# Altium PCB ALTAIR_PD_Squad_V26.5a_cut.PcbDoc (part 2 of 4)
Units mm, origin at the board's own origin, x right, y up, seen from the top; angles counter-clockwise.
Board outline 74 x 56 mm, 4 copper layers (Top Layer, Layer 2, Layer 3, Bottom Layer), stack 1.818 mm thick; 213 components, 155 nets, 610 pads, 404 vias.
Unrouted connection lines stored in the file: 6.
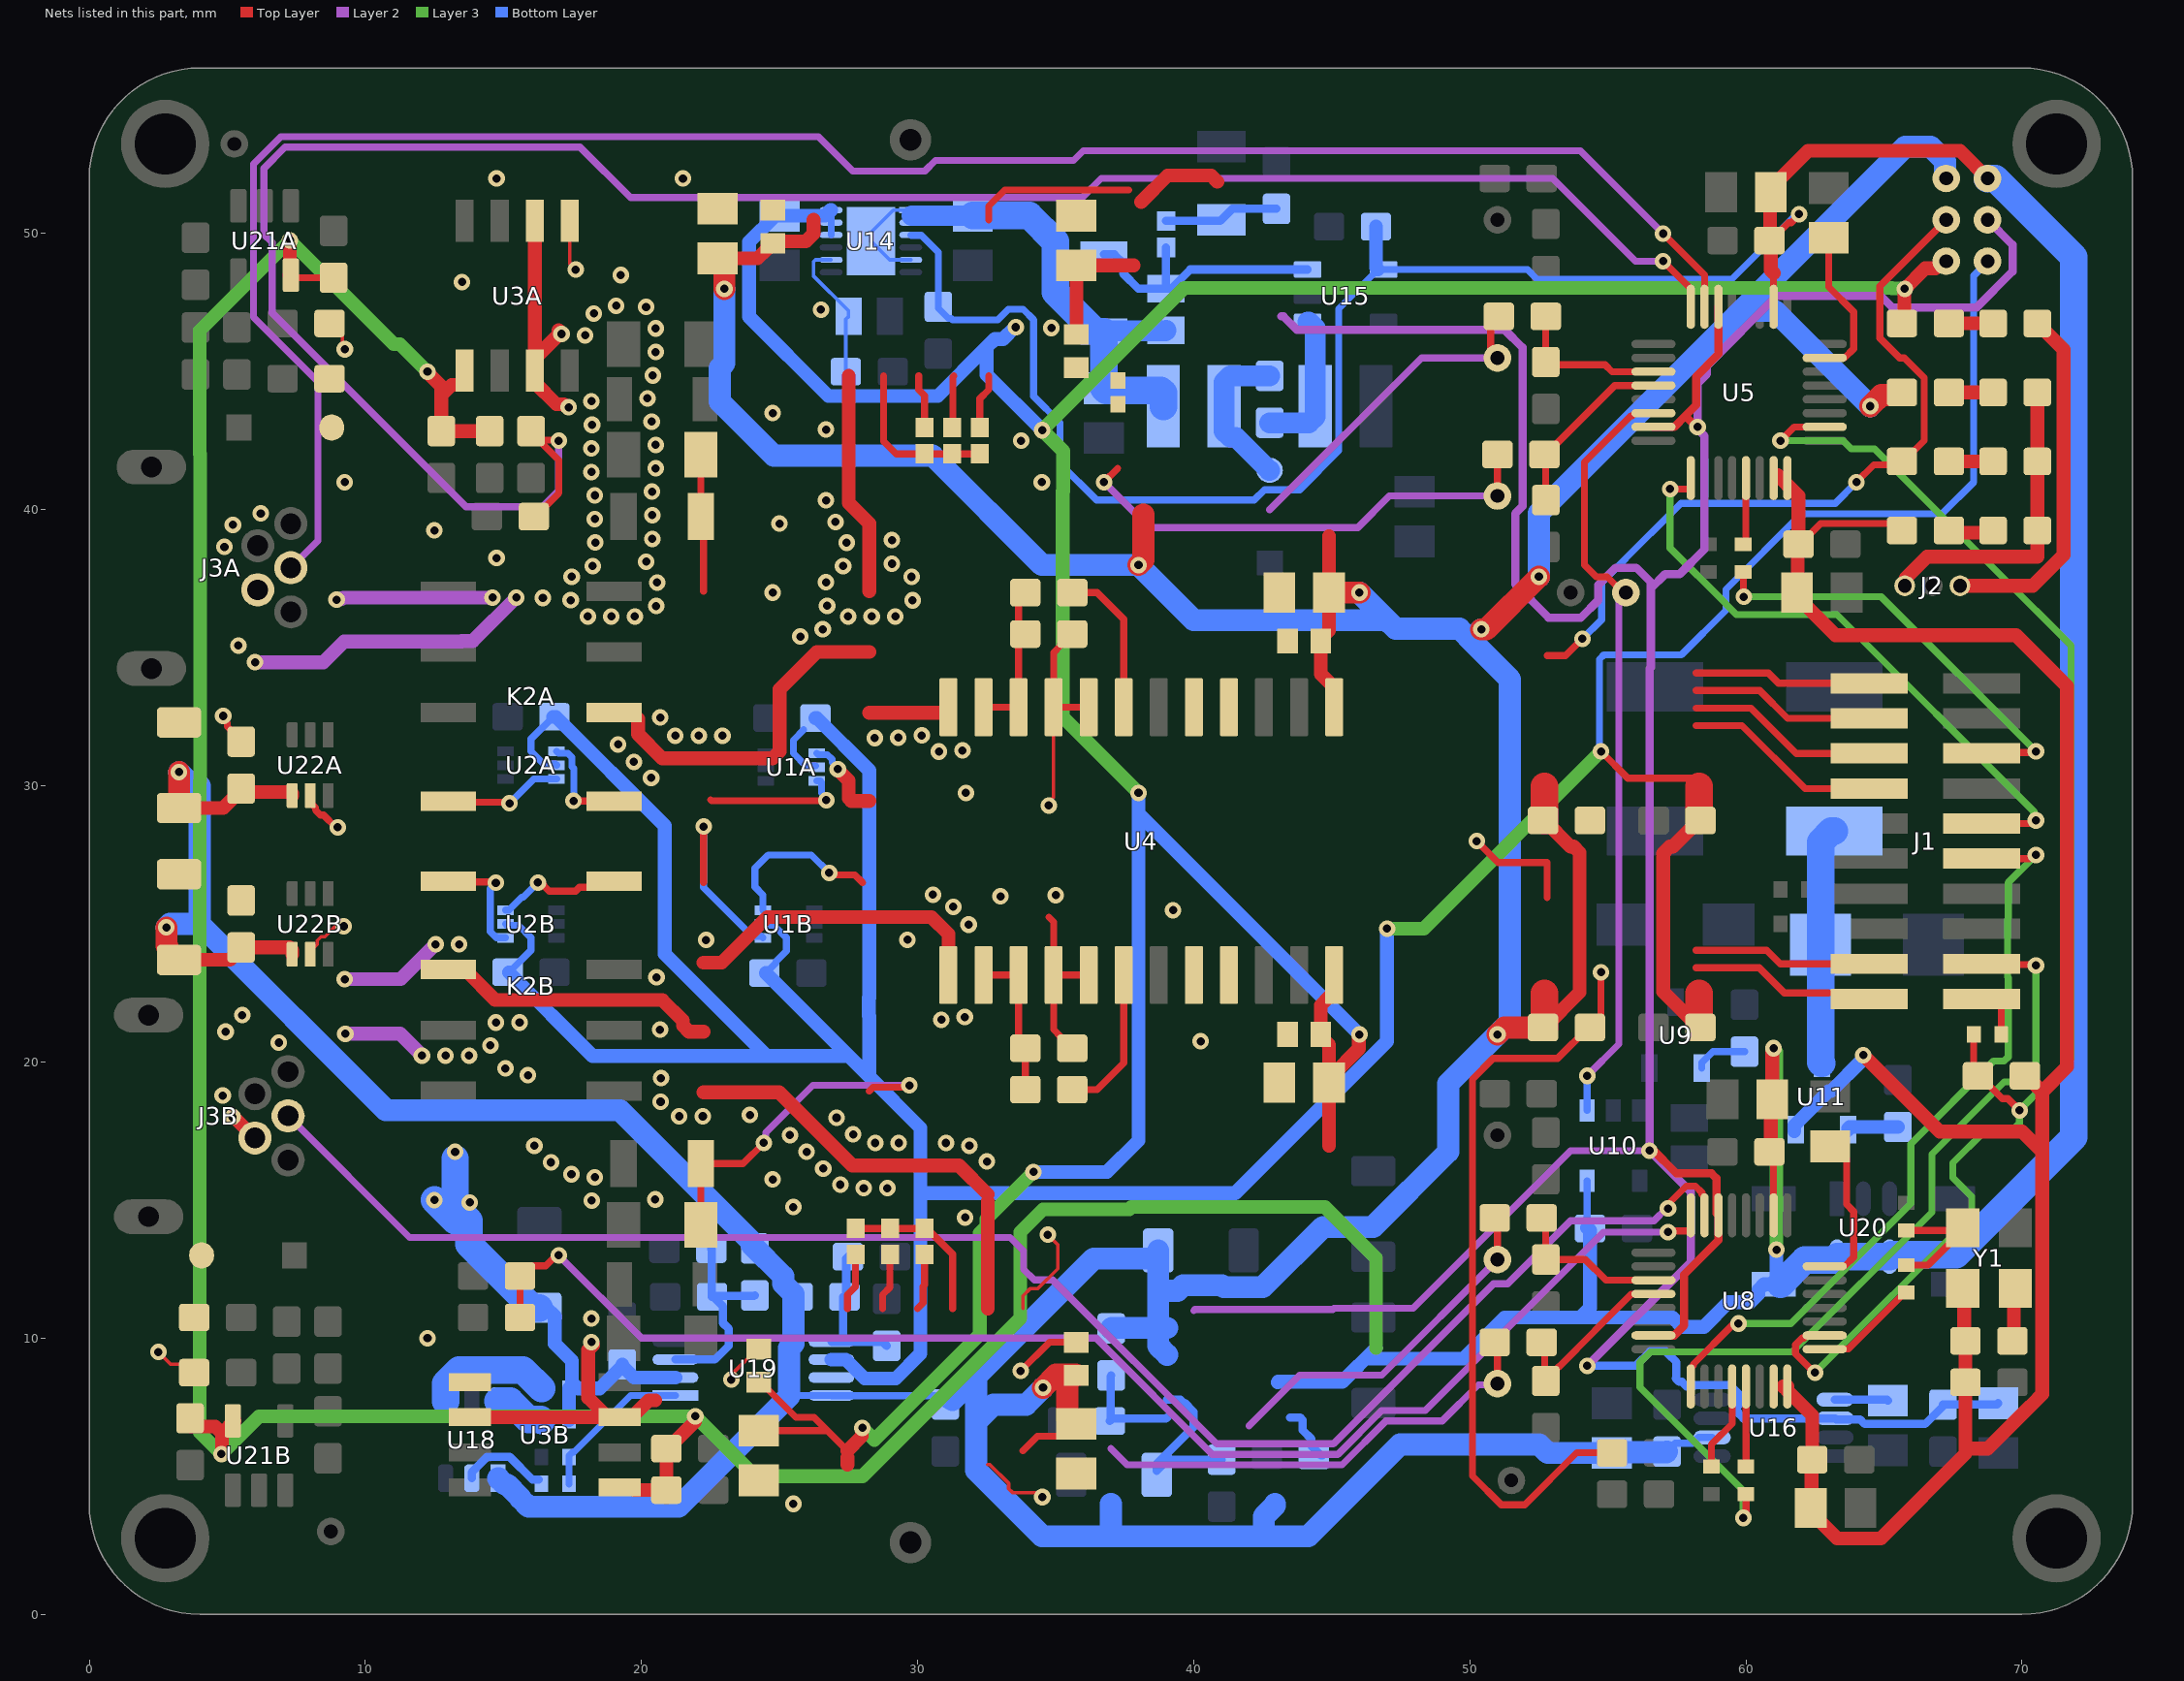
[diagram p4: the nets of this part, all layers, seen from the top]

## Part data
C00A C0A C00B C0B: library part CAP, "Murata GRT188R61H105KE13D - Cap Ceramic 1uF 10% 50V X5R 0603 (Placeholder)", MF=Murata, MP=GRT188R61H105KE13D
C1A C1B C2A C2B C6A C6B C7 C9 C11 C13 C19A C19B C21A C21B C27 C29 C36 C37 C38 C39 C40 C41 C50 C54 C59 C64 C65 C67A C67B C71A C71B: library part CAP, "Kemet C0603C104K5RACAUTO - Cap Ceramic 0.1uF 50V X7R 10% 0603 125C Paper T/R", MF=Kemet, MP=C0603C104K5RACAUTO
C3A C3B: library part CAP, "Kemet C1206C301K5GACTU - Cap Ceramic 300pF 10% 50V NP0 1206", MF=Kemet, MP=C1206C301K5GACTU
C4A C4B: library part CAP, "Wurth Elektronik 885012008037 - Cap Ceramic 10pF 5% 50V NP0 1206", MF="Wurth Elektronik", MP=885012008037
C5A C5B C42 C49 C61 C66A C66B: library part CAP, "Murata GRT188R61H105KE13D - Cap MLCC AEC-Q200 X5R 1uF 50V 0603", MF=Murata, MP=GRT188R61H105KE13D
C8 C10 C12 C14 C17 C20A C20B C22A C22B C28 C30 C33 C43 C44 C46 C48 C51 C52 C53: library part CAP, "Murata GRM21BR61E106KA73L - Cap Ceramic 10uF 10% 25V X5R 0805", MF=Murata, MP=GRM21BR61E106KA73L
C15 C16 C18 C31 C32 C34 C35: library part CAP, "Murata GCM1885C1H202FA16J 50V 2nF C0G ±1% 0603", MF=Murata, MP=GCM1885C1H202FA16J
C45: library part CAP, "Kemet C1206C331J5GACTU - Cap Ceramic 330pF 50V 5% NP0 1206", MF=Kemet, MP=C1206C331J5GACTU
C47: library part CAP, "Kemet C0805C475K8PACTU - Cap Ceramic 4.7uF 10V X5R 0805", MF=Kemet, MP=C0805C475K8PACTU
C55 C56 C57 C58 C60 C68A C68B: library part CAP, "Murata GRT319R6YA106KE01D - Cap Ceramic 10uF 35V X5R 10% Pad SMD 1206 85C Automotive T/R", MF=Murata, MP=GRT319R6YA106KE01D
C62 C63: library part CAP, "CL31B225KBHNNNE CAP CER 2.2UF 50V X7R 1206", MF="Samsung Electro-Mechanics", MP=CL31B225KBHNNNE
D1: library part Zener, "Vishay SMAJ12A-M3/61 - TVS Diode 12V Standoff 13.3V Breakdown DO-214AC", MF="Vishay General Semiconductor", MP=SMAJ12A-M3/61
D2: "600 W, 3.3 V TVS in SMB", Manufacturer_Name=STMicroelectronics, Copyright="Copyright (C) 2025 Ultra Librarian. All rights reserved.", Manufacturer_Part_Number=SMLVT3V3, RefDes=Refdes
D3 D5 D6 D7: library part LED-blue, "LED RED CLEAR 0603 SMD", Case Code (Imperial)=0603, Case Code (Metric)=1608, Color=Blue, Forward Current=30mA, Forward Voltage=3.2V, Max Operating Temperature=85°C, Min Operating Temperature=-40°C, Package Quantity=4000, Supplier Part Number 1=732-4966-1-ND, Test Current=20mA, Case/Package=0603, Category=LEDs, ComponentLink1Description=https://datasheet.ciiva.com/29563/150060bs75000-29563034.pdf?src-supplier=Digi-Key, ComponentLink1URL=https://datasheet.ciiva.com/29563/150060bs75000-29563034.pdf?src-supplier=Digi-Key, ComponentLink2Description=https://datasheet.ciiva.com/29279/759426-da-01-en-chipled-0603-w-kl-blau-150060bs75000-29279193.pdf?src-supplier=Conrad, ComponentLink2URL=https://datasheet.ciiva.com/29279/759426-da-01-en-chipled-0603-w-kl-blau-150060bs75000-29279193.pdf?src-supplier=Conrad, ComponentLink3Description=https://datasheet.ciiva.com/29563/150060bs75000-29563035.pdf?src-supplier=Digi-Key, ComponentLink3URL=https://datasheet.ciiva.com/29563/150060bs75000-29563035.pdf?src-supplier=Digi-Key, ComponentLink4Description=https://datasheet.ciiva.com/29563/150060bs75000-29563036.pdf?src-supplier=Digi-Key, ComponentLink4URL=https://datasheet.ciiva.com/29563/150060bs75000-29563036.pdf?src-supplier=Digi-Key, ComponentLink5Description=https://datasheet.ciiva.com/22656/1911343-22656939.pdf?src-supplier=Element14, ComponentLink5URL=https://datasheet.ciiva.com/22656/1911343-22656939.pdf?src-supplier=Element14, ComponentLink6Description=https://datasheet.ciiva.com/48430/150060bs75000-eng-tds-48430039.pdf?src-supplier=Distrelec, ComponentLink6URL=https://datasheet.ciiva.com/48430/150060bs75000-eng-tds-48430039.pdf?src-supplier=Distrelec, Dominant Wavelength=470nm, Height=0.7mm, Length=1.6mm, Lens Style=Clear,Rectangular, Luminous Intensity=145mcd, MF="Wurth Electronics", Mount="Surface Mount", MP=150060RS75000, Packaging="Cut Tape", REACH SVHC=Unknown, RoHS=Yes, Stock 1=66561, Supplier 1=Digi-Key, Viewing Angle=140°, Wavelength=470nm, Width=0.8mm
D4: library part Schottky, "DIODE SCHOTTKY 20V 500MA SOD123", Average Rectified Current=500mA, Case/Package=SOD-123-2, Forward Voltage=385mV, Max Forward Surge Current (Ifsm)=5.5A, Max Operating Temperature=125°C, Max Repetitive Reverse Voltage (Vrrm)=20V, Max Reverse Leakage Current=250uA, Min Operating Temperature=-65°C, Package Quantity=3000, Contact Plating=Tin, Current Rating=500mA, Element Configuration=Single, Forward Current=500mA, Height=1.12mm, Lead Free="Lead Free", Length=2.69mm, Max Reverse Voltage (DC)=20V, Max Surge Current=5.5A, MF=onsemi, MP=MBR0520LT1G, Number of Pins=2, Output Current=500mA, Packaging="Tape and Reel", Peak Non-Repetitive Surge Current=5.5A, Peak Reverse Current=250uA, Polarity=Standard, Radiation Hardening=No, REACH SVHC="No SVHC", Termination=SMD/SMT, Voltage Rating (DC)=20V, Width=1.6mm
D8A D8B: library part Zener, "DIODE ZENER SOD123", MF=onsemi, MP=MMSZ4679T1G
F1 F2: library part Polyfuse, "Bel Fuse 0ZCG0030FF2C - Polymeric PTC Resettable Fuse 30V 300mA hold 600mA trip SMD 1812", MF="Bel Fuse Inc.", MP=0ZCG0030FF2C
H1 H2 H3 H4 SH1: "(Plated) Mounting hole"
J1: Package=None, Availability=Unavailable, MF=Samtec, MP=FTSH-110-01-X-DV-K-TR, Price=None
J2: "3x1 Header SMD", Manufacturer_Name="GCT (GLOBAL CONNECTOR TECHNOLOGY)", Datasheet Link=https://www.mouser.com/datasheet/2/837/BC020-1948594.pdf, Height=3.2mm, Manufacturer_Part_Number=BC020-03-A-0200-0300-L-G
J3A J3B: "Conn Mini-USB RCP 5 POS Solder ST Thru-Hole 5 Terminal 1 Port", Color=Black, Flammability Rating="UL94 V-0", Supplier Part Number 1=UE25BE5510H-ND, Category="USB Connectors", ComponentLink1Description=http://components.arrow.com/part/dataview/0323_00956300?src-supplier=Arrow+Europe, ComponentLink1URL=http://components.arrow.com/part/dataview/0323_00956300?src-supplier=Arrow+Europe, ComponentLink2Description=http://www.alliedelec.com/m/d/e7e3d7a920045eebbdef787e60d8b001.pdf?src-supplier=Allied+Electronics, ComponentLink2URL=http://www.alliedelec.com/m/d/e7e3d7a920045eebbdef787e60d8b001.pdf?src-supplier=Allied+Electronics, ComponentLink3Description=https://www.amphenolcanada.com/ProductSearch/drawings/AC/UE25BEX510X.pdf?src-supplier=Digi-Key, ComponentLink3URL=https://www.amphenolcanada.com/ProductSearch/drawings/AC/UE25BEX510X.pdf?src-supplier=Digi-Key, Contact Material="Copper Alloy", Contact Plating=Gold, Features="High Temperature", Gender=Female, Lead Free="Lead Free", MF="Amphenol Commercial", Mount="Through Hole", MP=UE25BE5510H, Number of Contacts=5, Number of Positions=5, RoHS=Yes, Stock 1=6446, Supplier 1=Digi-Key, Termination=PCB
K2A K2B: "RelÃ© RF, CC, biestable, 1 bobina, 2 conectores DPDT-CO de forma C, capacidad de contacto de 2 A, voltaje de bobina de 4,5 V CC, voltaje de contacto de 250 V CA, Axicom IM", Package=None, Check_prices=https://www.snapeda.com/parts/3-1462037-1/TE+Connectivity+Potter+%2526+Brumfield+Relays/view-part/?ref=eda, EU_RoHS_Compliance=Compliant, MF="TE Connectivity", MP=3-1462037-1, SnapEDA_Link=https://www.snapeda.com/parts/3-1462037-1/TE+Connectivity+Potter+%2526+Brumfield+Relays/view-part/?ref=snap
L1 L2: library part IND, "TDK VLS3012CX-100M-1 - Inductor 10uH 20% 1.25A 0.324Ohm NonstandardPkg", DC Resistance (DCR)=324mR, Inductance Tolerance=20%, Max DC Current=1.25A, Max Operating Temperature=105°C, Min Operating Temperature=-40°C, Resistor Type=Wirewound, Saturation Current=1A, Test Frequency=100kHz, Core Material=Ferrite, Height=1.20mm, Height - Seated (Max)=0.047inch, Inductance=10uH, Lead Free="Lead Free", Length=3.00mm, MF="TDK Corporation", Mount="Surface Mount", MP=VLS3012CX-100M-1, Number of Pins=2, Packaging="Tape and Reel", Series=VLS-CX-1, Termination=SMD/SMT, Tolerance=20%, Width=3.00mm
R0A R0B: library part RES, "Yageo RC0402JR-070RL - Res 0 Ohms 1/16W SMD 0402", MF=YAGEO, MP=RC0402JR-070RL
R1A R1B: library part RES, "Stackpole RNCF1206TKY10K0 - Res 10k 0.01% 1/4W SMD 1206", MF="Stackpole Electronics Inc.", MP=RNCF1206TKY10K0
R2A R2B: library part RES, "Vishay TNPV12061M00BYEN - Res 1MOhm 0.1% 1/4W SMD 1206", MF="Vishay Dale", MP=TNPV12061M00BYEN
R5 R6 R7 R8 R15A R15B R16A R16B R17A R17B: library part IMPEDANCE, "Yageo RC0402JR-070RL - Res 0 Ohms 1/16W SMD 0402", MF=YAGEO, MP=RC0402JR-070RL
R9 R11 R13 R19 R21 R23 R24: library part RES, "Panasonic ERJ-3EKF2001V Res Thick Film 0603 2K Ohm 1% 1/10W ±100ppm/°C", MF="Panasonic Electronic Components", MP=ERJ-3EKF2001V
R10 R12 R20 R22 R29 R30 R31 R47 R51: library part RES, "Stackpole RMCF0402JT47R0 - Res 47Ohm 5% 0.063W 0402 Thick Film AEC-Q200 compliant", MF="Stackpole Electronics Inc.", MP=RMCF0402JT47R0
R18A1: library part RES, "Panasonic ERA-2AEB5111X - Res 5.11k 0.1% 1/16W SMD 0402", MF="Panasonic Electronic Components", MP=ERA-2AEB5111X
R25 R26 R28 R35: library part RES, "Panasonic ERJ-U03F1001V - Res SMD 1 kOhm 1% 1/10W 0603", MF="Panasonic Electronic Components", MP=ERJ-U03F1001V
R27 R33 R43 R54 R55: library part RES, "Vishay CRCW060310K0FKEA SMD 0603 10k, CRCW e3 Series, 75V, thick film, 100mW", MF="Vishay Dale", MP=CRCW060310K0FKEA
R32 R34: library part RES, "Yageo RC0402FR-0733RL - Res 33Ohm 1% 1/16W 0402", MF=YAGEO, MP=RC0402FR-0733RL
R36: library part RES, "Panasonic ERA-6AEB303V - Res 30kOhm 0.1% 1/8W 0805", MF="Panasonic Electronic Components", MP=ERA-6AEB303V
R37: library part RES, "Yageo RC0402FR-071KL - Res 1kOhm 1% 1/16W 0402", MF=YAGEO, MP=RC0402FR-071KL
R38 R39: library part RES, "Panasonic ERJ-3GEYJ104V - Res 100k 5% 1/10W SMD 0603", MF="Panasonic Electronic Components", MP=ERJ-3GEYJ104V
R40: library part RES, "Panasonic ERA-3AEB114V - Res 110k 0.1% 1/10W SMD 0603", MF="Panasonic Electronic Components", MP=ERA-3AEB114V
R41: library part RES, "Vishay TNPU12061K50BZEN00 - Res 1.5kOhm 0.1% 1/4W 1206", MF="Vishay Dale", MP=TNPU12061K50BZEN00
R42 R56A R56B R57A R57B: library part RES, "Vishay MCT06030C3003FP500 - Res SMD 300kOhm 1% 1/10W 0603", MF="Vishay Dale", MP=MCT06030C3003FP500
R44: library part RES, "Panasonic ERA-3ARB104V - Res SMD 0603 0.1% 0.10W T.C. 10ppm 100K", MF="Panasonic Electronic Components", MP=ERA-3ARB104V
R45 R50: library part RES, "Panasonic ERJ-3EKF6800V - Res SMD 680 Ohm 1% 1/10W 0603", MF="Panasonic Electronic Components", MP=ERJ-3EKF6800V
R46: library part RES, "Vishay CRCW06030000Z0EA - Res 0 Ohms 1/8W SMD 0603", MF="Vishay Dale", MP=CRCW06030000Z0EA
R48 R49: library part RES, "Yageo RL0402JR-070R1L - Res 0.1Ohm 5% 1/16W SMD 0402", MF=YAGEO, MP=RL0402JR-070R1L
R52: library part RES, "Vishay TNPW06032K32BEEA - Res 2.32k 0.1% 0.21W SMD 0603", MF="Vishay Dale", MP=TNPW06032K32BEEA
R53: library part RES, "KOA Speer RN73R1JTTD2231B25 - Res 2.23k 0.1% 1/10W SMD 0603", MF="KOA Speer Electronics, Inc.", MP=RN73R1JTTD2231B25
Rsense1: library part RES
RT1A RT1B: library part "THERM_RES NTC 0603 10K 1%", "THERMISTOR NTC 10KOHM 3380K 0603", Case Code (Imperial)=0603, Case Code (Metric)=1608, Max Operating Temperature=125°C, Min Operating Temperature=-40°C, Supplier Part Number 1=490-16279-1-ND, Case/Package=0603, Category=Thermistors, ComponentLink1Description=http://www.farnell.com/datasheets/2095755.pdf?src-supplier=Farnell, ComponentLink1URL=http://www.farnell.com/datasheets/2095755.pdf?src-supplier=Farnell, ComponentLink2Description=https://www.murata.com/en-us/products/productdata/8796836233246/L0770E.pdf?src-supplier=Digi-Key, ComponentLink2URL=https://www.murata.com/en-us/products/productdata/8796836233246/L0770E.pdf?src-supplier=Digi-Key, ComponentLink3Description=http://www.farnell.com/datasheets/2095755.pdf?src-supplier=Element14, ComponentLink3URL=http://www.farnell.com/datasheets/2095755.pdf?src-supplier=Element14, MF=Murata, MP=NCU18XH103F60RB, REACH SVHC="No SVHC", RoHS=No, Stock 1=48580, Supplier 1=Digi-Key
U1A U1B U2A U2B: "Bipolar Motor Driver NMOS PWM SOT-563"
U3A U3B: "Op Amp, 36V, fA input, precision, e-trim", Mouser Part Number=595-OPA928DR, Arrow Part Number=OPA928DR, Arrow Price/Stock=null?region=nac, Datasheet Link=https://www.ti.com/lit/ds/symlink/opa928.pdf?HQS=dis-mous-null-mousermode-dsf-pf-null-wwe&ts=1731036524091&ref_url=https%253A%252F%252Fwww.ti.com%252Fgeneral%252Fdocs%252Fsuppproductinfo.tsp%253FdistId%253D26%2526gotoUrl%253Dhttps%253A%252F%252Fwww.ti.com, Height=1.75mm, MF="Texas Instruments", Mouser Price/Stock=https://www.mouser.co.uk/ProductDetail/Texas-Instruments/OPA928DR?qs=2wMNvWM5ZX5RgAZJHoeYSw%3D%3D, MP=OPA928DR
U4: "Low Noise, Dual Switched Integrator, 14.5 to 36 V, -40 to 125 degC, 24-pin SOIC (DW24), Green (RoHS & no Sb/Br)", Rating=Catalog, Total Supply Voltage(Max)(+5V is 5, +/-5V is 10)=36, Total Supply Voltage(Min)(+5V is 5, +/-5V is 10)=14.5, Code_JEDEC=MS-013, ComponentLink1Description="Manufacturer URL", ComponentLink1URL=http://www.ti.com/, ComponentLink2Description=Datasheet, ComponentLink2URL=http://www.ti.com/lit/ds/symlink/acf2101.pdf, ComponentLink3Description="Package Specification", ComponentLink3URL=http://www.ti.com/litv/pdf/mpds174a, DatasheetVersion=SBFS003, Eco-Plan="Green (RoHS & no Sb/Br)", GBW(Typ)(MHz)=2, Iq per channel(Max)(mA)=15, MF="Texas Instruments", Mounting Technology="Surface Mount", MP=ACF2101BU, Number of Channels=2, Offset Drift(Typ)(uV/C)=1, PackageDescription="24-Pin Plastic Small Outline, Body 15.4 x 7.5 mm, Pitch 1.27 mm", PackageReference=DW0024A, PackageVersion="4040000-5/G, 01/2011", Packing=TUBE, Slew Rate(Typ)(V/us)=3, Sub Family="Precision Amplifier", Vio (25C)(Max)(mV)=2
U5 U8: "24BIT ADC Delta-Sigma 4k samples/s PGA V-reference", Case/Package=LQFP, Max Operating Temperature=125°C, Min Operating Temperature=-50°C, Supplier Part Number 1=296-45170-1-ND, Category="Analog to Digital Converters (ADCs)", ComponentLink1Description=http://www.ti.com/general/docs/lit/getliterature.tsp?genericPartNumber=ADS124S08&fileType=pdf&src-supplier=Farnell, ComponentLink1URL=http://www.ti.com/general/docs/lit/getliterature.tsp?genericPartNumber=ADS124S08&fileType=pdf&src-supplier=Farnell, ComponentLink2Description=http://www.ti.com/lit/ds/symlink/ads124s06.pdf?src-supplier=Digi-Key, ComponentLink2URL=http://www.ti.com/lit/ds/symlink/ads124s06.pdf?src-supplier=Digi-Key, Interface=SPI, MF="Texas Instruments", Mount="Surface Mount", MP=ADS124S08IPBSR, Number of A/D Converters=1, Number of Bits=24, Number of Inputs=12, Number of Pins=32, Packaging="Tape and Reel", RoHS=No, Sampling Rate=4000S/s, Stock 1=2523, Supplier 1=Digi-Key
U9: library part PMOS, "MOSFET P-CH 30V 5A SOT23-3", MF="Vishay Siliconix", MP=SI2347DS-T1-GE3, Supplier 1=Avnet, Supplier Part Number 1=SI2347DS-T1-GE3
U10: library part INA180A1IDBVT, "26V, 350kHz current sense amplifier 5-SOT-23 -40 to 125", Manufacturer_Name="Texas Instruments", Copyright="Copyright (C) 2025 Ultra Librarian. All rights reserved.", Manufacturer_Part_Number=INA180A1IDBVT, RefDes=RefDes, Type=TYPE
U11: library part PMOS_LV, "P-Channel 30 V 6A (Ta) 1W (Ta) Surface Mount SOT-23F", Supplier Part Number 1=SI2347DS-T1-GE3, MF=Toshiba, MP=SSM3J332R,LF, Supplier 1=Avnet
U14: "-20V 500mA Ultralow Noise Ultrahigh PSRR Adjustable Negative Linear Regulator 12DFN", MF="Analog Devices", MP=LT3094EDD#PBF, RoHS Compliant=Yes
U15: library part LM2611AMF, "1.4MHz Cuk Converter, 5-pin SOT-23, Pb-Free", PackageTopMarking=S40A*XTT, PowerWise=N, ComponentLink1Description="Datasheet URL", ComponentLink1URL=http://www.ti.com/general/docs/lit/getliterature.tsp?genericPartNumber=LM2611&fileType=pdf, CompType=Switcher, MF="Texas Instruments", MP=LM2611AMF/NOPB, PackageDescription="Molded SOT-23, .115 x .063 x .040 in Body, 5 Lead, .0375 in Pitch", PackageReference=DBV0005A, PinCount=5, RoHS=Y
U16: library part REF5050IDGKR, "2.5V±0.05% Voltage Reference 8VSSOP", Case/Package=VSSOP, Max Input Voltage=18V, Max Operating Temperature=125°C, Max Output Current=10mA, Max Output Voltage=5V, Min Input Voltage=5.2V, Min Operating Temperature=-40°C, Nominal Supply Current=800uA, Operating Supply Current=1.2mA, Package Quantity=1, Supplier Part Number 1=296-27505-1-ND, Temperature Coefficient=3ppm/°C, Tolerance=0.05%, Category="Voltage References", ComponentLink1Description=https://datasheet.ciiva.com/2007/ref5020-2007532.pdf?src-supplier=Digi-Key, ComponentLink1URL=https://datasheet.ciiva.com/2007/ref5020-2007532.pdf?src-supplier=Digi-Key, ComponentLink2Description=https://datasheet.ciiva.com/14197/ref5050-14197084.pdf?src-supplier=Avnet, ComponentLink2URL=https://datasheet.ciiva.com/14197/ref5050-14197084.pdf?src-supplier=Avnet, ComponentLink3Description=https://datasheet.ciiva.com/2007/ref5020-2007533.pdf?src-supplier=Digi-Key, ComponentLink3URL=https://datasheet.ciiva.com/2007/ref5020-2007533.pdf?src-supplier=Digi-Key, ComponentLink4Description=https://datasheet.ciiva.com/2007/ref5020-2007534.pdf?src-supplier=Digi-Key, ComponentLink4URL=https://datasheet.ciiva.com/2007/ref5020-2007534.pdf?src-supplier=Digi-Key, ComponentLink5Description=https://datasheet.ciiva.com/41462/001014471-da-01-en-ic-vref-series-ref5050idgkr-vssop-8-tid-41462326.pdf?src-supplier=Conrad, ComponentLink5URL=https://datasheet.ciiva.com/41462/001014471-da-01-en-ic-vref-series-ref5050idgkr-vssop-8-tid-41462326.pdf?src-supplier=Conrad, Lead Free="Lead Free", MF="Texas Instruments", Min Output Voltage=5V, MP=REF5025IDGKR, Number of Channels=1, Number of Pins=8, Output Current=10mA, Output Type=Fixed, Output Voltage=5V, Packaging="Tape and Reel", Pricing 1="1=6.18000, 10=5.58100, 25=5.32200, 100=4.41320, 250=4.02380, 500=3.76420, 1000=3.45268 (USD)", Quiescent Current=800uA, Radiation Hardening=No, Reference Type=Series, RoHS=Yes, Stock 1=2539, Supplier 1=Digi-Key, Weight=0.00067oz
U18: "BJT Array, 1NPN 1PNP, VCE(sat) 375mV, hFE 300, Breakdown 30V, 6-SOT-23", MF="Diodes Incorporated", MP=ZXTC2045E6TA
U19: library part OPA2182IDBV, "Op amp, 2 Channel, Highest-precision, 36-V, 5-MHz, single, low-noise, zero-drift, MUX-friendly amplifier 8VSSOP -40 to 125", MF="Texas Instruments", MP=OPA2182IDGKR
U20: library part ADP7142AUJZ-R7, "1.2-40V 200mA Low Noise CMOS LDO Adjustable Linear Regulator TSOT23", Ambient Temperature Range High=+125°C, Ambient Temperature Range Low=-40°C, Dropout Voltage=200mV, Manufacturer="Analog Devices", Max Junction Temp=+150°C, Max Supply Voltage=40V, Min Supply Voltage=2.7V, Nominal Supply Current=50-180uA, Output Current=200mA, Output Voltage=1.2-5V, Package=UJ-5, Temperature="-40°C to +125°C", Accuracy Percentage=0.8%, Automotive=No, Category=IC, ComponentLink2Description=Datasheet, ComponentLink2URL=https://www.analog.com/media/en/technical-documentation/data-sheets/ADP7142.pdf, Device Class L1="Integrated Circuits (ICs)", Device Class L2="Power Management ICs", Device Class L3="Voltage Regulators - Linear", Digikey Description="IC REG LIN POS ADJ 200MA TSOT23", Height=1mm, Lead Free=Yes, Manufacturer Part Number=ADP7142AUJZ-R7, MF="Analog Devices", Mouser Description="LDO Regulator Pos 1.5V to 5V 0.2A 5-Pin TSOT-23 T/R", MP=ADP7142AUJZ-5.0-R7, Number of Outputs=1, Octopart=https://octopart.com/adp7142aujz-r7-analog+devices-38928114, Output Type=AdjustableProgrammable, RoHS=TRUE, Temperature Range High=+125°C, Temperature Range Low=-40°C
U21A U21B: "Single, ultra-high-precision (10 Î¼V) zero-drift (0.01 Î¼V/Â°C) low-input-bias-current op amp", Package=None, Check_prices=https://www.snapeda.com/parts/TLV387DBVR/Texas+Instruments/view-part/?ref=eda, MF="Texas Instruments", MP=TLV387DBVR, SnapEDA_Link=https://www.snapeda.com/parts/TLV387DBVR/Texas+Instruments/view-part/?ref=snap
U22A U22B: "DAC 8bit 1 channel SPI Supply Reference Buffered Voltage", MF="Texas Instruments", MP=DAC5311IDCKR
Y1: "MEMS OSC XO 4.096MHZ H/LVCMOS", Case/Package=SMD/SMT, Max Supply Current=4.5mA, Height=0.032inch, MF=SiTime, Mount="Surface Mount", MP=SiT1602BC-21-XXN-4.096000, RoHS Compliant=Yes, Series=SIT1602, Width=0.098inch

## Via types
v1: diameter 0.6, hole 0.3, Top Layer to Bottom Layer, tented both sides, 303 vias
v2: diameter 0.8, hole 0.5, Top Layer to Bottom Layer, 97 vias
v3: diameter 0.6, hole 0.3, Top Layer to Bottom Layer, 4 vias

## Nets (pads, with @x,y where several pads share a name; then routed paths per layer and width w, separated by ;. In a path a pad name is that pad's centre, name@x,y a point inside that pad or via, vN(x,y) a via of type N, cw(c..) or ccw(c..) an arc to the next point about the centre after c; other vN are vias at no path point)
3V3: C11.2 C12.2 C27.2 C28.2 C37.2 R26.2 R27.1 R33.2 U5.15 U5.16 U8.15 U8.16 U11.2 Y1.4 | length 80.7
  Top Layer w0.254: C11.2@61.9,38.75 61.95,38.75 62.704,39.504 65.396,39.504 R26.2@65.65,39.25
  Top Layer w0.5: 61.15,41.25 61.5,40.9 61.9,40.5 C11.2@61.9,38.75 61.875,38.725 61.875,36.825 63.241,35.459 69.781,35.459 71.627,33.613 71.627,19.823 70.727,18.923 ; U8.16@61.5,8.25 61.35,8.25 61.5,8.1 62.4,7.2 C27.2@62.4,5.6 62.375,5.575 62.375,3.875 C28.2@62.35,3.85 62.35,3.7 63.302,2.748 64.881,2.748 67.95,5.817 C37.2@67.95,8.45 ; v1(64.25,20.25) 67.02,17.48 69.997,17.48 70.727,16.75 ; Y1.4@67.85,11.8 67.9,11.75 67.9,9.95 R33.2@67.95,9.9 C37.2@67.95,8.45 ; 68,6 68.75,6 70.273,7.523 70.283,7.523 70.577,7.817 70.577,7.827 70.727,7.977 70.727,16.75 ; C37.2@68,8.5 C37.2@67.95,8.45 ; R27.1@70.1,19.5 70.15,19.5 70.727,18.923 ; 70.727,16.75 70.727,18.923
  Bottom Layer w0.5: U11.2@61.75,17.5 61.75,17.7 62.999,18.949 63.082,18.949 64.231,20.098 64.231,20.231 v1(64.25,20.25)
4V9: C0A.1 C00A.1 C00B.1 C0B.1 C7.1 C8.1 C9.1 C10.1 C19A.1 C19B.1 C20A.1 C20B.1 C21A.1 C21B.1 C22A.1 C22B.1 C38.1 C41.1 C59.2 C60.2 C67A.1 C67B.1 C68A.1 C68B.1 D8A.2 D8B.2 R6.1 R7.1 R24.1 R48.1 R49.1 R50.2 TP13.1 U3A.1 U3B.1 U4.4 U4.5 U4.8 U4.9 U4.16 U4.17 U4.20 U4.21 U19.2 U22A.5 U22B.5 | length 110.1
  Top Layer w0.127: v1(2.5,9.5) 2.938,9.062 3.488,9.062 C0B.1@3.8,8.75 ; U22B.5@8,23.9 8,24 8.26,24.259 8.26,24.4 8.4,24.541 8.541,24.541 8.916,24.916 v1(9.216,24.916) ; C0A.1@8.7,46.75 8.717,46.75 9.149,46.318 9.149,46.301 9.166,46.284 9.166,45.903 v1(9.257,45.813) ; U3A.1@17.405,50.462 17.405,48.906 v1(17.616,48.694) ; v1(23.25,8.5) 23.341,8.591 23.341,8.766 24.175,9.6 C21B.1@24.25,9.6 ; 32.54,5.425 32.613,5.425 33.295,4.743 33.295,4.55 33.435,4.41 34.354,4.41 v1(34.516,4.247) ; 33.81,11.075 33.81,11.526 34.072,11.788 34.344,11.788 35.074,12.518 35.074,13.386 v1(34.713,13.747) ; v1(34.75,29.29) 34.75,29.418 34.925,29.593 U4.21@34.925,32.85 ; C21A.1@35.675,45.15 C21A.1@35.75,45.15
  Top Layer w0.254: v3(4.851,32.534) 4.851,32.44 5,32.291 5,32.15 5.5,31.65 C67A.1@5.5,31.6 ; U22A.5@8,29.65 8,29.4 8.196,29.204 8.196,29.124 8.374,28.946 8.483,28.946 8.929,28.5 v3(9,28.5) ; v3(33.733,8.816) 34.767,9.85 C19B.1@35.75,9.85 ; 34.75,25.25 34.925,25.075 U4.4@34.925,23.15 ; R6.1@35.6,20.5 35.55,20.5 35.177,20.873 35.177,20.923 34.925,21.175 U4.4@34.925,23.15 ; R7.1@35.6,35.5 35.55,35.5 35.177,35.127 35.177,35.077 34.925,34.825 U4.21@34.925,32.85 U4.20@36.195,32.85 ; U4.5@36.195,23.15 U4.4@34.925,23.15 ; v1(50.25,28) 51.028,27.223 52.8,27.223 52.8,26.588 52.8,25.953 ; 52.8,34.723 53.469,34.723 v1(54.073,35.327) ; C38.1@54.35,21.25 54.3,21.25 53.179,20.129 50.844,20.129 50.096,19.382 50.096,5.008 51.135,3.969 51.991,3.969 53.872,5.85 R24.1@55.15,5.85 ; C38.1@54.377,21.25 54.75,21.623 v1(54.75,23.25) ; v1(64,41) 64.625,41.625 65.525,41.625 R50.2@65.65,41.75 65.7,41.75 66.454,42.504 66.454,44.782 65.736,45.5 65.564,45.5 64.846,46.218 64.846,48.096 TP13.1@67.25,50.5
  Bottom Layer w0.254: v1(54.073,35.327) 54.769,36.022 54.769,37.365 56.553,39.149 56.564,39.149 57.646,40.231 63.231,40.231 v1(64,41)
  Bottom Layer w0.5: C60.2@16.554,11.099 16.854,10.799 16.854,9.799 17.477,9.175 17.477,8.397 17.7,8.174 18.479,8.174 C59.2@19.304,8.999 ; R48.1@17.379,7.024 R49.1@17.379,8.174 ; C59.2@19.304,9.049 C59.2@19.304,8.999 ; U19.2@21.228,8.574 19.729,8.574 C59.2@19.304,8.999
  Bottom Layer w1: v1(12.5,15) 13.25,14.25 13.75,14.25 ; v1@13.25,16.5 13.25,14.75 13.75,14.25 ; C60.2@16.304,11.099 16.054,11.099 13.75,13.403 13.75,14.25
  other v1: 25.5,4 12.25,10 25.5,14.75 13.784,14.916 24.75,15.75 13.25,16.75 40.25,20.75 39.25,25.5 33,26 35,26.04 31.75,29.75 24.75,37 14.75,38.25 12.5,39.25 25,39.5 34.5,41 33.75,42.5 24.75,43.5 34.848,46.585 26.5,47.25 13.5,48.25 19.25,48.5 14.75,52 21.5,52
  other v3: 9.25,41
10V: C9.2 C10.2 C19A.2 C19B.2 C20A.2 C20B.2 C38.2 C41.2 C50.1 C51.2 C57.2 C61.2 C67A.2 C67B.2 C68A.2 C68B.2 R42.2 R45.2 R52.2 R54.2 TP12.1 U4.13 U16.2 U18.1 U19.8 U22A.4 U22B.4 | length 259.9
  Top Layer w0.254: 33.81,5.925 34.337,6.452 35.302,6.452 C20B.2@35.75,6.9
  Top Layer w0.5: C68B.2@3.25,23.7 5.1,23.7 5.5,24.1 C67B.2@5.5,24.15 7.25,24.15 7.35,24.05 U22B.4@7.35,23.9 ; C68A.2@3.25,29.2 4.85,29.2 5.5,29.85 C67A.2@5.5,29.9 5.625,29.775 7.3,29.775 7.35,29.725 U22A.4@7.35,29.65 ; C20A.2@22.75,49.1 24.2,49.1 24.55,49.45 24.55,49.525 24.675,49.65 C19A.2@24.75,49.65 24.82,49.72 25.95,49.72 26.23,50 26.23,50.5 ; C9.2@44.6,35.25 44.6,34.05 45,33.65 45.01,33.65 45.085,33.575 U4.13@45.085,32.85 ; C9.2@44.6,35.325 44.9,35.625 C10.2@44.9,37 44.9,39.05 ; C41.2@52.65,28.75 52.7,28.75 53.645,27.805 53.756,27.805 53.977,27.584 53.977,22.527 C38.2@52.7,21.25
  Top Layer w0.8: v1(2.793,24.875) 2.793,24.207 2.85,24.15 2.85,23.85 2.95,23.75 C68B.2@3.25,23.75 ; C68A.2@3,29.25 3.15,29.25 3.25,29.35 v1(3.25,30.5) ; C20A.2@22.75,49.1 22.825,49.1 23,48.925 v1(23,48) ; v1(34.543,8.207) 35.01,8.675 35.133,8.675 ; C20B.2@35.75,6.9 35.6,6.9 35.425,7.075 35.425,8.383 35.133,8.675 ; C19B.2@35.75,8.65 35.725,8.675 35.133,8.675 ; v1(38,38) 38.175,38.175 38.175,39.825 ; C10.2@44.9,37 v1(46,37) ; v1(50.413,35.671) 50.598,35.671 v1(52.5,37.573) ; v1(51,21) 51.25,21.25 C38.2@52.65,21.25 ; v1(64.5,43.75) 64.9,44.15 65.55,44.15 R45.2@65.65,44.25
  Top Layer w1: C38.2@52.7,21.25 52.7,22.483 ; C41.2@52.7,28.75 52.7,29.983
  Bottom Layer w0.254: 25.347,7.899 25.372,7.924 U19.8@26.879,7.924 26.892,7.911 30.689,7.911 C61.2@31,7.6 ; C50.1@57.139,5.893 57.437,6.191 58.069,6.191 58.283,6.405 U16.2@58.775,6.405
  Bottom Layer w0.8: v1(2.793,24.875) 2.918,25 4,25 ; v1(3.25,30.5) 3.75,30 4,30 4,25 ; U18.1@14.804,4.924 14.829,4.924 15.054,4.699 15.133,4.699 15.602,4.231 15.602,4.206 15.91,3.897 21.345,3.897 25.347,7.899 25.347,9.642 25.504,9.799 25.504,11.599 25.131,11.972 25.131,12.244 23.964,13.411 23.964,13.511 19.219,18.256 10.744,18.256 4,25 ; v1(23,48) 23,45.301 22.83,45.131 22.83,43.92 24.792,41.958 30.542,41.958 34.5,38 v1(38,38) 40,36 47,36 ; C61.2@31.261,7.761 32.125,8.625 ; v1(34.543,8.207) 33.927,7.592 32.741,7.592 32.125,6.976 ; 37,4 37,2.823 ; R42.2@37.01,10.35 37.035,10.375 38.71,10.375 ; 39.035,9.4 38.71,9.725 38.71,10.375 ; 39.035,10.375 38.71,10.375 ; 42.944,4 42.944,3.944 42.541,3.541 42.541,2.823 ; v1(46,37) 47,36 ; v1(50.413,35.671) 50.154,35.412 50.154,35.154 ; v1(52.5,37.573) 52.5,39.882 59.817,47.199 ; C50.1@57.139,5.893 57.114,5.868 55.164,5.868 C51.2@55.139,5.843 52.824,5.843 52.512,6.154 47.474,6.154 44.143,2.823 42.541,2.823 ; v1(64.5,43.75) 61.051,47.199 59.817,47.199 ; TP12.1@67.25,51.985 67.212,52.023 67.212,52.624 66.681,53.154 65.772,53.154 59.817,47.199 ; 32.125,6.976 32.125,8.625 ; 32.125,6.976 32.125,5.21 34.512,2.823 37,2.823 ; 32.125,8.625 36.379,12.879 38.56,12.879 38.71,13.029 C57.2@38.71,13.175 38.71,11.713 ; 37,2.823 42.541,2.823 ; 38.71,10.375 38.71,11.713 ; 38.71,11.713 39.412,11.713 39.619,11.92 41.023,11.92 41.095,11.848 42.498,11.848 44.677,14.027 46.492,14.027 49.219,16.754 49.219,19.219 v1(51,21) 51.452,21.452 51.452,33.857 50.154,35.154 ; 47,36 47.309,35.691 49.618,35.691 50.154,35.154
-11V: C7.2 C8.2 C21A.2 C21B.2 C22A.2 C22B.2 C43.1 R35.2 TP10.1 U4.12 U14.10 U14.11 U14.12 | length 145.3
  Top Layer w0.254: C22B.2@24.25,6.65 26.735,6.65 ; C21B.2@24.25,8.4 24.325,8.4 25.588,7.138 26.248,7.138 26.735,6.65 ; 27.46,5.675 27.46,5.925 26.735,6.65 ; 32.58,50.5 32.58,51 33.159,51.579 37.652,51.579
  Top Layer w0.5: 27.46,5.425 27.46,5.675 ; 27.46,5.925 27.981,6.446 27.981,6.731 v1(28,6.75) ; C21A.2@35.75,46.35 C22A.2@35.75,48.85 37.825,48.85 ; 38.1,51.15 39.052,52.102 40.631,52.102 40.852,51.881 ; C7.2@44.6,20.925 44.9,20.625 C8.2@44.9,19.25 44.9,16.972 ; C7.2@44.6,21 44.6,22.057 44.893,22.35 45.01,22.35 45.085,22.425 U4.12@45.085,23.15 ; C8.2@45,19.25 45,19.5 45.981,20.481 45.981,20.981 v1(46,21) ; R35.2@65.65,46.75 65.731,46.831 65.731,47.981 66.492,48.742 66.857,48.742 67.115,49 TP10.1@67.25,49
  Layer 3 w0.5: v1(28,6.75) 28.432,6.318 32.25,10.137 32.25,13.808 32.49,14.048 32.49,14.316 v1(34.195,16.02) ; v1(34.514,42.882) 35.27,42.126 35.27,40.681 35.25,40.661 35.25,32.5 v1(38,29.75) ; v1@34.546,42.915 39.662,48.03 42.25,48.03 65.28,48.03 65.291,48.019 65.731,48.019 v1(65.75,48)
  Bottom Layer w0.254: U14.10@26.869,49.95 U14.11@26.869,50.4 U14.12@26.869,50.85
  Bottom Layer w0.5: U14.12@26.869,50.85 26.842,50.85 26.642,50.65 C43.1@25,50.65 24.85,50.65 23.898,49.698 23.898,46.992 26.767,44.123 30.733,44.123 32.5,45.89 ; v1(33.554,46.611) 33.527,46.611 33.098,46.183 32.793,46.183 32.5,45.89 ; v1(34.195,16.02) 36.859,16.02 36.863,16.024 38,17.161 38,29 ; v1(34.514,42.882) 32.5,44.896 32.5,45.89 ; v1(38,29.75) 38,29 ; v1(46,21) 38,29
-11V_EN: C5A.2 C5B.2 C6A.2 C6B.2 C13.2 C14.2 C29.2 C30.2 C36.2 C63.1 C66A.2 C66B.2 R38.1 R39.1 TP14.1 U3A.5 U3B.5 U5.26 U8.26 U10.5 U14.3 U15.4 U20.4 U20.5 U21A.5 U21B.5 | length 274.9
  Top Layer w0.254: U21A.5@7.3,48.495 7.395,48.4 8.75,48.4 C66A.2@8.85,48.5 ; C29.2@60.85,16.75 61,16.6 U8.26@61,14.45 ; C13.2@60.875,49.775 60.925,49.775 61.544,50.394 61.633,50.394 61.922,50.684 v1(61.922,50.709) ; 60.9,48.5 61,48.4 U5.26@61,47.35
  Top Layer w0.5: C66B.2@3.5,7 3.7,6.8 4.558,6.8 4.804,6.554 ; v1(4.785,5.806) 4.804,5.825 4.804,6.554 ; U21B.5@5.25,7 4.804,6.554 ; U21A.5@7.25,48.5 7.268,48.518 v1(7.268,49.758) ; v1(12.25,45) 12.25,44.973 12.75,44.473 12.75,44.15 ; U3A.5@13.595,45.038 13.595,44.601 13.52,44.525 13.125,44.525 12.75,44.15 ; C6A.2@14.5,42.85 C5A.2@12.75,42.85 12.75,44.15 ; U3B.5@19.212,4.595 19.65,4.595 19.744,4.5 20.65,4.5 20.9,4.25 C6B.2@20.9,4.5 C5B.2@20.9,5.75 ; C5B.2@21,6 21,6.05 21.928,6.978 21.928,7.154 v1(21.947,7.173) ; C29.2@60.85,16.75 60.9,16.8 60.9,18.6 C30.2@60.95,18.65 60.95,20.423 61,20.473 v1(61,20.5) ; C13.2@60.85,49.75 60.9,49.7 60.9,48.673 61.001,48.572 ; C13.2@60.875,49.775 60.875,51.475 C14.2@60.9,51.5 60.9,51.65 62.25,53 66.83,53 66.834,53.004 67.666,53.004 67.67,53 67.75,53 TP14.1@68.817,51.933
  Layer 3 w0.5: v1(12.25,45) 11.25,46 11.027,46 v1(7.268,49.758) 4,46.49 4,42.031 4.02,42.011 4.02,30.181 4,30.161 4,6.591 v1(4.785,5.806) 6.151,7.173 v1(21.947,7.173) 24.12,5 28,5 33.721,10.721 33.721,13.843 34.542,14.664 37.664,14.664 37.75,14.75 44.75,14.75 46.603,12.897 46.603,9.647 ; v1(61,20.5) 61,20.473 61.103,20.37 v1(61.103,13.206)
  Bottom Layer w0.254: U14.3@29.75,49.95 29.766,49.934 30.137,49.934 30.75,49.321 R38.1@30.75,47.35 30.75,47.3 31.123,46.927 31.224,46.927 31.272,46.879 32.907,46.879 33.286,47.258 33.822,47.258 34.201,46.879 34.201,44.11 35.161,43.15 35.161,41.674 36.482,40.353 42.188,40.353 42.561,40.726 43.835,40.726 45.254,42.145 45.254,47.279 U15.4@46.675,48.7 ; U15.4@46.875,48.7 52.085,48.7 52.431,48.353 59.484,48.353 61.839,50.709 v1(61.922,50.709) ; C36.2@54.25,14.075 U10.5@54.25,15.7
  Bottom Layer w0.5: 43.037,8.402 43.06,8.425 43.485,8.425 45.381,8.425 46.603,9.647 ; 46.315,9.254 49.768,9.254 51.264,10.75 54,10.75 ; R39.1@46.6,50.25 46.6,48.775 U15.4@46.675,48.7 ; C36.2@54.25,14 54.35,13.9 54.35,11.1 54,10.75 ; v1(61.103,13.206) 61.103,12.053 C63.1@61,11.95 60.65,11.95 60.45,11.75 60.45,11.593 60.157,11.3 59.364,11.3 58.474,10.41 57.681,10.41 57.341,10.75 54,10.75
  Bottom Layer w1: C63.1@61.25,11.95 62.123,12.823 63.173,12.823 U20.5@63.3,12.95 U20.4@65.2,12.95 65.277,13.027 67.614,13.027 71.877,17.29 71.877,49.146 69.023,52 TP14.1@68.75,52
-16V: C45.1 C46.1 C48.1 L2.2 R36.2 U14.1 U14.2 U14.5 U14.13 | length 20.6
  Bottom Layer w0.127: U14.5@29.75,49.05 28.984,49.05 U14.13@28.309,49.725 28.309,50.039 29.121,50.85 U14.1@29.75,50.85
  Bottom Layer w0.75: 29.791,50.65 C48.1@32,50.65 ; C45.1@36.75,46.45 36.775,46.475 38.975,46.475 R36.2@39,46.5
  Bottom Layer w1: C48.1@32,50.65 34.05,50.65 34.986,49.714 34.986,47.889 36.425,46.45 C45.1@36.75,46.45 C46.1@36.75,44.4 36.825,44.325 38.8,44.325 38.9,44.225 L2.2@38.9,43.75
\DRDY1: J1.15 R12.2 | length 15.8
  Top Layer w0.254: R12.2@59.9,37.75 59.909,37.741 59.909,36.857 v1(59.919,36.848) ; J1.15@68.533,31.175 68.571,31.213 70.462,31.213 v1(70.5,31.25)
  Layer 3 w0.254: v1(59.919,36.848) 64.902,36.848 v1(70.5,31.25)
\DRDY2: J1.03 R22.2 | length 33.7
  Top Layer w0.254: v1(59.901,3.491) 60,3.59 R22.2@60,4.35 ; J1.03@68.533,23.555 68.561,23.528 70.472,23.528 v1(70.5,23.5)
  Layer 3 w0.254: v1(59.901,3.491) 59.901,4.484 56.163,8.223 56.163,8.587 56.163,9.123 56.542,9.502 57.078,9.502 61.674,9.502 66.732,14.56 66.732,16.661 69.349,19.278 69.857,19.278 70.5,19.921 v1(70.5,23.5)
\SPI_CS1: J1.11 U5.9 | length 22.8
  Top Layer w0.254: v1(57.25,40.75) 57.979,40.75 57.979,41.129 U5.9@58,41.15 ; J1.11@68.533,28.635 70.291,28.635 70.406,28.75 v1(70.5,28.75)
  Layer 3 w0.254: v1(57.25,40.75) 57.25,38.615 59.272,36.593 59.272,36.58 59.651,36.201 63.299,36.201 70.434,29.066 70.434,28.816 v1(70.5,28.75)
\SPI_CS2: J1.09 U8.9 | length 27.9
  Top Layer w0.254: U8.9@58,8.25 58,8.912 58.096,9.008 58.096,9.067 59.492,10.463 59.662,10.463 v1(59.728,10.53) ; J1.09@68.533,27.365 70.271,27.365 70.406,27.5 v1(70.5,27.5)
  Layer 3 w0.254: v1(59.728,10.53) 61.624,10.53 65.97,14.875 65.97,17.032 68.978,20.04 69.351,20.04 69.5,20.189 69.5,23.046 69.472,23.074 69.472,25.176 69.5,25.204 69.5,26.5 v1(70.5,27.5)
\SYS_RESET: J1.01 R29.1 | length 1.9
  Top Layer w0.254: J1.01@68.533,22.285 69.009,22.285 69.25,22.044 R29.1@69.25,21
A2V5: C53.2 C54.1 TP11.1 U5.7 U5.30 U8.7 U8.30 U16.6 | length 132.4
  Top Layer w0.3: v1(56.506,16.79) 56.583,16.867 57.482,15.968 58.751,15.968 58.927,15.792 58.927,14.523 U8.30@59,14.45 59,13.545 57.762,12.307 57.762,10.458 57.404,10.1 U8.7@56.65,10.1 ; U5.7@56.65,43 57.404,43 57.803,43.399 ; v1(58.25,43) 58.202,43 57.803,43.399 ; U5.30@59,47.35 59,45.63 58.202,44.832 58.202,43.798 57.803,43.399
  Layer 2 w0.254: 40,11 40.041,11.041 45.041,11.041 45.082,11.082 47.941,11.082 53.648,16.79 v1(56.506,16.79)
  Layer 2 w0.3: 43.173,47 43.254,47 43.735,46.518 51.26,46.518 51.904,45.874 51.904,40.126 51.648,39.87 51.648,37.298 52.85,36.096 54.024,36.096 54.65,36.722 54.65,37.278 55.276,37.904 56.024,37.904 56.554,37.374 56.554,37.149 ; v1(54.25,9) 58,12.75 58,15.297 v1(56.506,16.79) 56.506,34.25 56.554,34.298 56.554,37.149 ; TP11.1@68.75,50.5 69.654,49.596 69.654,48.626 68.358,47.33 65.294,47.33 64.874,47.75 61.12,47.75 58.585,45.215 58.585,44.918 58.25,44.583 v1(58.25,43) 58.25,42.924 58.5,42.674 58.5,38.572 57.598,37.67 57.075,37.67 56.554,37.149
  Bottom Layer w0.3: v1(54.25,9) 56.008,9 56.532,9.525 57.087,9.525 57.181,9.431 57.48,9.132 57.48,8.577 57.451,8.549 57.58,8.42 57.681,8.42 57.85,8.25 58.08,8.25 58.132,8.302 59.418,8.302 59.727,7.993 59.727,7.557 59.605,7.435 59.727,7.313 59.727,7.273 59.905,7.095 U16.6@63.225,7.095 63.263,7.057 64.133,7.057 64.299,6.891 66.487,6.891 67.139,7.543 C54.1@67.139,7.593 69.089,7.593 C53.2@69.139,7.643
A5VSW: C1A.2 C1B.2 C2A.2 C2B.2 C39.2 C40.2 TP15.1 U1A.5 U1B.5 U2A.5 U2B.5 U19.6 U19.7 | length 149.9
  Top Layer w0.254: v1(54.75,31.25) 55.722,30.278 58.2,30.278
  Top Layer w0.5: C40.2@58.3,28.75 57.355,27.805 57.244,27.805 57,27.561 57,22.55 58.3,21.25 C39.2@58.35,21.25
  Top Layer w1: C39.2@58.3,21.25 58.3,22.483 ; C40.2@58.3,28.75 58.3,29.983
  Layer 3 w0.5: v1(47,24.829) 48.329,24.829 v1(54.75,31.25)
  Bottom Layer w0.254: U2B.5@15.075,25 15.123,24.952 15.548,24.952 16,24.5 16,24.05 C2A.2@15.2,23.25 ; C2B.2@16.8,32.5 16,31.7 16,31.25 16.452,30.798 16.877,30.798 U2A.5@16.925,30.75 ; U1B.5@24.4,25 24.448,24.952 24.798,24.952 25.25,24.5 25.25,24.02 24.874,23.644 24.874,23.594 C1B.2@24.501,23.221 ; C1A.2@25.875,32.036 25.499,31.66 25.499,31.18 25.951,30.728 U1A.5@26.301,30.728 ; v1(54.75,31.25) 54.696,31.304 54.696,34.585 54.861,34.75 57.665,34.75 59.272,36.357 59.272,37.116 62.006,39.85 67.1,39.85 68.25,41 68.25,48.478 68.75,48.978 TP15.1@68.75,49
  Bottom Layer w0.5: C2A.2@15.2,23.25 18.23,20.22 24.539,20.22 ; C2B.2@16.8,32.5 16.9,32.5 20.844,28.556 20.844,23.914 24.539,20.22 ; C1B.2@24.501,23.221 27.503,20.22 ; C1A.2@26.298,32.459 26.348,32.459 28.25,30.557 28.25,22.339 28.23,22.319 28.23,21.681 28.25,21.661 28.25,19.473 ; U19.6@26.879,9.224 27.397,9.224 28.084,8.538 29.202,8.538 30.106,9.441 30.106,15.25 ; v1(47,24.829) 47,20.75 41.504,15.254 36.002,15.254 35.998,15.25 30.106,15.25 ; 24.539,20.22 27.503,20.22 ; 27.503,20.22 28.25,19.473 ; 28.25,19.473 30.106,17.617 30.106,15.25
ACF_CHA_ADCIN: C16.2 R11.2 U5.3 | length 5.7
  Top Layer w0.254: R11.2@52.75,47 52.75,45.4 52.9,45.25 54.9,45.25 55.15,45 U5.3@56.65,45
ACF_CHB_ADCIN: C32.2 R21.2 U8.3 | length 5.8
  Top Layer w0.254: R21.2@52.6,14.35 52.75,14.2 C32.2@52.75,12.85 54.18,12.85 54.93,12.1 U8.3@56.65,12.1
ACF_HOLD: J1.16 | length 6.9
  Top Layer w0.254: 58.2,32.818 60.176,32.818 61.818,31.175 J1.16@64.469,31.175
ACF_RESET: J1.14 | length 7.2
  Top Layer w0.254: 58.2,32.183 59.858,32.183 62.136,29.905 J1.14@64.469,29.905
ADC_RESET: R27.2 R29.2 U5.18 U8.18 | length 52.8
  Top Layer w0.254: v1(61.25,42.5) 61.75,43 U5.18@62.85,43 ; v1(62.5,8.75) 62.479,8.75 61.796,9.433 61.796,9.767 62.033,10.004 62.092,10.004 62.188,10.1 U8.18@62.85,10.1 ; R29.2@68.25,21 68.25,19.65 R27.2@68.4,19.5 68.45,19.5 69.279,18.671 69.485,18.671 v1(69.906,18.25)
  Layer 3 w0.254: v1(61.25,42.5) 63.521,42.5 63.816,42.205 64.653,42.205 65.179,41.679 65.929,40.929 69.179,37.679 71.778,35.08 71.778,20.122 v1(69.906,18.25) 69.906,17.78 69.57,17.444 68.592,17.444 67.494,16.346 67.494,15.81 68.172,15.132 68.172,14.422 v1(62.5,8.75)
CSENSE_CHA_ADCIN: TP5.1 U5.6 U10.1 | length 28.1
  Top Layer w0.254: TP5.1@55.65,37 55.547,37 54.975,37.571 54.579,37.571 54.15,38 54.15,41.721 55.833,43.404 55.892,43.404 55.988,43.5 U5.6@56.65,43.5
  Layer 2 w0.254: v1(54.25,19.5) 55.4,20.65 TP5.1@55.4,37
  Bottom Layer w0.254: U10.1@54.25,18.25 v1(54.25,19.5)
DRDY_CHA: R12.1 U5.13 | length 2.4
  Top Layer w0.254: R12.1@59.9,38.75 59.991,38.841 59.991,41.141 U5.13@60,41.15
GUARDA: J3A.4 U3A.2 U3A.7 | length 24.4
  Top Layer w0.5: U3A.7@16.135,45.038 16.135,44.601 16.917,43.818 17.182,43.818 v1@17.25,43.75 ; U3A.2@16.135,50.462 16.135,45.475 17,46.34 v1@17,46.5
  Layer 2 w0.5: v1(6.003,34.476) 8.476,34.476 9.23,35.23 13.48,35.23 13.5,35.25 13.893,35.25 v1(15.463,36.82) ; v1(8.96,36.744) 8.979,36.763 9.147,36.763 9.203,36.82 v1(14.609,36.82)
  other v1: 20.352,30.289 19.723,30.867 30.77,31.245 31.623,31.28 19.152,31.503 28.444,31.735 29.298,31.745 21.223,31.82 22.077,31.82 22.931,31.82 30.148,31.83 20.682,32.48 5.399,35.08 25.752,35.411 26.566,35.67 18.053,36.135 18.907,36.135 19.761,36.135 27.484,36.135 28.338,36.135 29.192,36.135 20.528,36.512 26.721,36.52 17.435,36.724 29.815,36.719 16.427,36.809 20.565,37.366 26.685,37.373 17.47,37.578 29.781,37.572 18.232,37.965 27.301,37.965 29.07,38.046 20.17,38.123 4.895,38.654 18.327,38.813 27.43,38.809 29.07,38.9 20.39,38.948 5.202,39.451 27.028,39.562 18.31,39.667 20.39,39.802 6.21,39.866 26.68,40.342 18.31,40.521 20.379,40.656 18.185,41.366 20.515,41.499 18.185,42.22 20.515,42.353 26.68,42.904 18.21,43.074 20.369,43.194 17.359,43.711 18.185,43.927 20.215,44.034 20.41,44.866 20.515,45.713 17.956,46.316 17.103,46.365 20.515,46.567 18.273,47.109 20.166,47.347 19.08,47.39
GUARDB: J3B.4 U3B.2 U3B.7 | length 17.5
  Top Layer w0.5: v1@5.25,18 J3B.4@6,17.25 ; U3B.2@13.788,7.135 18.775,7.135 18.073,7.837 18.073,9.573 v1@18.25,9.75 ; U3B.7@19.212,7.135 19.65,7.135 20.265,7.75 20.5,7.75
  Layer 2 w0.5: v1(9.25,23) 11.276,23 v1(12.541,24.265) ; v1(9.276,21.026) 11.256,21.026 v1(12.046,20.235)
  other v1: 18.185,9.858 18.185,10.712 31.72,14.367 18.195,14.982 20.497,15.023 28.048,15.43 28.902,15.43 27.204,15.559 18.31,15.829 17.463,15.938 26.583,16.145 16.724,16.366 32.51,16.4 25.979,16.748 16.121,16.97 31.874,16.97 28.464,17.07 29.318,17.07 31.026,17.07 25.375,17.352 27.668,17.378 27.064,17.982 5.191,18.01 21.365,18.035 22.219,18.035 23.926,18.08 20.693,18.562 4.834,18.786 20.708,19.415 15.886,19.523 15.069,19.77 12.9,20.235 13.754,20.235 14.525,20.601 6.862,20.703 4.938,21.098 20.669,21.172 14.731,21.43 15.585,21.43 30.86,21.531 31.708,21.632 5.542,21.701 20.545,23.07 13.395,24.265 22.34,24.42 29.629,24.43 31.849,24.977 31.288,25.621 30.555,26.059
IVC_CAPLINKA: R15A.1 R16A.1 R17A.1 | length 6
  Top Layer w0.254: 28.77,44.85 28.77,42.48 29.225,42.025 R15A.1@32.25,42.025
IVC_CAPLINKB: R15B.1 R16B.1 R17B.1 | length 5.9
  Top Layer w0.254: R15B.1@27.75,13.975 R16B.1@29,13.975 30,13.975 30.334,13.975 31.27,13.039 31.27,11.075
IVC_CHA_ADCIN: C18.2 R13.2 U5.4 | length 6.8
  Top Layer w0.254: C18.2@52.9,40.5 52.75,40.65 52.75,41.95 R13.2@52.7,42 52.75,42 55.25,44.5 U5.4@56.9,44.5
IVC_CHB_ADCIN: C34.2 R23.2 U8.4 | length 6.7
  Top Layer w0.254: R23.2@52.6,9.85 52.711,9.739 52.711,8.489 C34.2@52.75,8.45 ; C34.2@52.75,8.5 53.219,8.969 53.235,8.969 54.538,10.273 54.538,10.287 55.842,11.591 56.641,11.591 U8.4@56.65,11.6
IVC_SW_1_CHA: J1.18 | length 6.7
  Top Layer w0.254: 58.2,33.453 60.493,33.453 61.501,32.445 J1.18@64.469,32.445
IVC_SW_1_CHB: J1.02 | length 5.2
  Top Layer w0.254: 58.2,23.413 60.48,23.413 61.393,22.5 63,22.5
IVC_SW_2_CHA: J1.20 | length 6.4
  Top Layer w0.254: 58.2,34.088 60.811,34.088 61.183,33.715 J1.20@64.469,33.715
IVC_SW_2_CHB: J1.04 | length 6.5
  Top Layer w0.254: 58.2,24.048 60.751,24.048 61.243,23.555 J1.04@64.469,23.555
LEDNG: D5.2 J2.3 | length 13
  Top Layer w0.5: J2.3@67.75,37.25 70.387,37.25 71.5,38.363 71.5,45.8 D5.2@70.55,46.75
LEDPG: D3.1 D6.1 D7.1 J2.1 | length 11.3
  Top Layer w0.5: J2.1@65.75,37.25 65.798,37.298 65.798,37.541 66.557,38.3 70.55,38.3 D3.1@70.55,39.25 D6.1@70.55,44.25
NetC3A_2: C3A.2 R1A.2 | length 5
  Top Layer w0.254: R1A.2@22.15,42 C3A.2@22.15,39.75 22.25,39.65 22.25,37.05
NetC3B_2: C3B.2 R1B.2 | length 12.7
  Top Layer w0.254: R1B.2@22.15,14.11 C3B.2@22.15,16.321 23.677,16.321 v1(24.428,17.072) ; 28.25,18.95 28.39,19.09 29.636,19.09 v1(29.702,19.156)
  Layer 2 w0.254: v1(24.428,17.072) 24.428,17.166 24.5,17.238 24.5,17.45 26.206,19.156 v1(29.702,19.156)
NetC17_2: C17.2 U5.23 | length 5.5
  Top Layer w0.254: U5.23@62.9,45.5 62.909,45.509 63.58,45.509 63.904,45.833 63.904,47.165 63,48.069 C17.2@63,49.85
NetC33_2: C33.2 U8.23 | length 5.7
  Top Layer w0.254: U8.23@62.85,12.6 62.859,12.609 63.58,12.609 63.904,12.933 63.904,14.589 63.648,14.845 63.648,16.502 63.2,16.95 C33.2@63.05,16.95
NetC42_1: C42.1 L1.2 U15.1 | length 5.3
  Bottom Layer w0.75: C42.1@42.75,43.15 44.175,43.15 44.4,43.375 L1.2@44.4,43.75 44.4,46.575 44.175,46.8 U15.1@44.125,46.8
NetC42_2: C42.2 D4.2 L2.1 | length 5.8
  Bottom Layer w0.75: D4.2@42.75,41.43 42.725,41.43 41.53,42.625 41.325,42.625 41.1,42.85 L2.1@41.1,43.75 41.1,44.625 41.325,44.85 C42.2@42.75,44.85
NetC45_2: C45.2 R36.1 R37.2 U15.3 | length 9.9
  Bottom Layer w0.3: C45.2@36.75,49.25 37.125,49.25 37.45,48.925 37.45,48.55 38,48 R36.1@39,48 ; R37.2@39,49.5 R36.1@39,48 ; U15.3@44.125,48.7 39.875,48.7 39.175,48 R36.1@39,48
NetC47_1: C47.1 R40.1 U14.8 | length 5.2
  Bottom Layer w0.127: U14.8@26.869,49.05 26.3,49.05 26.226,48.976 26.226,48.474 27.5,47.2 C47.1@27.5,47 27.4,46.9 R40.1@27.4,45
NetC49_1: C49.1 R37.1 R41.2 | length 4.2
  Bottom Layer w0.3: R37.1@39,50.457 40.957,50.457 R41.2@41,50.5 41.4,50.9 C49.1@43,50.9
NetC52_1: C52.1 U16.5 | length 1.9
  Bottom Layer w0.3: U16.5@63.225,7.775 65.107,7.775 C52.1@65.139,7.743
NetC58_2: C58.2 R44.2 | length 6.3
  Bottom Layer w0.3: 39.035,7.775 39.515,7.775 39.638,7.652 39.679,7.652 39.987,7.343 39.987,6.777 38.66,5.45 38.66,5.2 39.06,5.6 R44.2@41.01,5.6
NetC64_2: C64.2 R52.1 R53.2 U19.3 | length 7.5
  Bottom Layer w0.3: U19.3@21.228,9.224 22.657,9.224 23.164,9.732 23.164,10.335 22.95,10.549 22.95,11.149 22.6,11.499 C64.2@22.554,11.499 ; R53.2@22.529,13.224 22.541,13.212 22.541,11.512 C64.2@22.554,11.499 ; R52.1@24.104,11.549 24.079,11.524 22.579,11.524 C64.2@22.554,11.499
NetC65_2: C65.2 R54.1 R55.2 U19.5 | length 5.6
  Bottom Layer w0.3: R54.1@27.304,11.499 27.304,9.912 27.266,9.874 U19.5@26.879,9.874 26.895,9.859 28.744,9.859 C65.2@28.879,9.724 ; R54.1@27.354,11.499 27.416,11.562 27.416,12.887 R55.2@27.479,12.949
NetC71A_2: C71A.2 RT1A.2 U5.32 | length 81.2
  Top Layer w0.254: C71A.2@16.1,39.75 16.15,39.75 17.004,40.604 17.004,41.796 16.15,42.65 16.15,43 16.15,42.749 16.373,42.526 16.974,42.526 v1(17,42.5) ; v1(57,49) 58,48 U5.32@58,47.35
  Layer 2 w0.254: v1(17,42.5) 17,40.697 16.408,40.105 13.645,40.105 6.621,47.129 6.621,49.682 6.326,49.977 6.326,52.364 7.093,53.131 17.773,53.131 19.601,51.303 35.952,51.303 36.649,52 53,52 56,49 v1(57,49)
NetC71B_2: C71B.2 RT1B.2 U8.32 | length 51.1
  Top Layer w0.254: C71B.2@15.6,10.75 RT1B.2@15.6,12.25 15.973,12.623 16.529,12.623 16.906,13 v1(17,13) ; v1(57.176,13.841) 57.219,13.884 57.979,13.884 58,13.905 U8.32@58,14.45
  Layer 2 w0.254: v1(17,13) 20,10 36.461,10 40.667,5.795 45.219,5.795 46.806,7.381 48.381,7.381 54.841,13.841 v1(57.176,13.841)
NetD2_1: D2.1 F2.2 U11.3 | length 8.7
  Bottom Layer w1: U11.3@62.75,19.95 62.705,19.995 D2.1@62.705,24.25 62.705,27.97 63.095,28.36 F2.2@63.2,28.36
NetD3_2: D3.2 R26.1 | length 1.7
  Top Layer w0.5: R26.1@67.35,39.25 67.429,39.171 D3.2@68.983,39.171
NetD5_1: D5.1 R35.1 | length 1.6
  Top Layer w0.5: R35.1@67.35,46.75 D5.1@68.95,46.75
NetD6_2: D6.2 R45.1 | length 1.6
  Top Layer w0.5: R45.1@67.35,44.25 D6.2@68.95,44.25
NetD7_2: D7.2 R50.1 | length 1.6
  Top Layer w0.5: R50.1@67.35,41.75 D7.2@68.95,41.75
NetJ3A_3: J3A.3 U5.31 | length 72.8
  Top Layer w0.254: v1(57,50) 58.5,48.5 U5.31@58.5,47.35
  Layer 2 w0.254: J3A.3@7.3,37.9 8.281,38.881 8.281,44.64 5.945,46.976 5.945,52.522 6.935,53.512 26.403,53.512 27.646,52.269 30.268,52.269 30.646,52.647 35.647,52.647 36,53 54,53 v1(57,50)
NetJ3B_3: J3B.3 U8.31 | length 61.4
  Top Layer w0.254: v1(57.176,14.695) 57.243,14.762 57.243,14.914 57.833,15.504 58.167,15.504 58.404,15.267 58.404,15.208 58.5,15.112 U8.31@58.5,14.45
  Layer 2 w0.254: J3B.3@7.2,18.05 11.603,13.647 33.353,13.647 33.844,13.156 33.844,12.492 34.223,12.113 34.887,12.113 40.824,6.176 45.062,6.176 50.855,11.969 51.365,11.969 53.646,14.25 56.67,14.25 57.115,14.695 v1(57.176,14.695)
NetK1A_1: U1A.4 | length 2.9
  Top Layer w0.5: v1(27.109,30.609) 27.109,30.582 27.5,30.191 27.5,29.55 27.6,29.45 28.25,29.45
  Bottom Layer w0.254: U1A.4@26.349,31.18 26.397,31.132 26.731,31.132 26.903,30.96 26.903,30.847 v1@27,30.75
NetK1A_2: U4.24 | length 2.9
  Top Layer w0.5: 28.25,32.65 30.917,32.65 31.115,32.848 U4.24@31.115,32.85
NetK1A_3: K2A.2 | length 13.2
  Top Layer w0.5: K2A.2@19,32.65 19.65,32.65 19.873,32.427 19.873,31.877 20.75,31 24.75,31 25,31.25 25,33.5 26.35,34.85 28.25,34.85
NetK1A_4:  | length 8.1
  Top Layer w0.5: 27.5,44.85 27.5,40.25 28.25,39.5 28.25,37.05
NetK1A_8: U1A.6 | length 5.1
  Top Layer w0.254: 22.5,29.5 22.534,29.466 26.675,29.466 v1(26.691,29.482)
  Bottom Layer w0.254: U1A.6@26.349,30.18 26.474,30.18 26.522,30.132 26.522,29.745 26.75,29.517 v1@26.75,29.5
NetK1B_1: U1B.4 | length 7.1
  Top Layer w0.254: 22.25,26.5 v1(22.25,28.528)
  Bottom Layer w0.254: v1(22.25,28.528) 22.25,26.316 24.018,24.548 24.352,24.548 U1B.4@24.4,24.5
NetK1B_2: U4.1 | length 11.3
  Top Layer w0.5: 22.25,23.6 22.9,23.6 24.55,25.25 30.5,25.25 31.115,24.635 U4.1@31.115,23.15
NetK1B_3: K2B.2 | length 10.3
  Top Layer w0.5: K2B.2@13,23.3 13.65,23.3 14.7,22.25 20.75,22.25 21.5,21.5 21.5,21.323 21.723,21.1 22.25,21.1
NetK1B_4:  | length 15.7
  Top Layer w0.5: 22.25,18.9 24.987,18.9 27.637,16.25 31.5,16.25 32.54,15.21 ; 32.54,11.075 32.54,14.96
NetK1B_8: U1B.6 | length 6.2
  Top Layer w0.254: v1(26.798,26.853) 26.891,26.853 26.971,26.773 27.727,26.773 28,26.5
  Bottom Layer w0.254: U1B.6@24.4,25.5 24.392,25.508 24.392,26.056 24.103,26.345 24.103,27.018 24.585,27.5 26.151,27.5 v1(26.798,26.853)
NetK2A_1: K2A.1 U2A.4 | length 3.5
  Top Layer w0.254: v1(17.535,29.461) 17.54,29.455 18.705,29.455 K2A.1@18.75,29.5
  Bottom Layer w0.254: U2A.4@16.925,31.25 16.996,31.179 17.33,31.179 17.479,31.03 17.479,30.696 17.55,30.625 17.55,29.461 v1(17.535,29.461)
NetK2A_8: K2A.8 U2A.6 | length 4.6
  Top Layer w0.254: K2A.8@12.75,29.5 12.839,29.411 15.183,29.411 v1(15.222,29.373)
  Bottom Layer w0.254: v1(15.222,29.373) 16.099,30.25 U2A.6@16.925,30.25
NetK2B_1: K2B.1 U2B.4 | length 4
  Top Layer w0.254: K2B.1@13.25,26.5 13.27,26.52 14.694,26.52 v1(14.724,26.489)
  Bottom Layer w0.254: v1(14.724,26.489) 14.521,26.286 14.521,24.72 14.67,24.571 14.679,24.571 14.75,24.5 U2B.4@15.075,24.5
NetK2B_8: K2B.8 U2B.6 | length 4.4
  Top Layer w0.254: v1(16.25,26.5) 16.344,26.5 16.659,26.184 17.614,26.184 17.756,26.327 18.577,26.327 K2B.8@18.75,26.5
  Bottom Layer w0.254: U2B.6@15.075,25.5 15.2,25.5 15.667,25.967 15.717,25.967 v1(16.25,26.5)
NetR5_1: R5.1 U4.6 | length 5.4
  Top Layer w0.254: R5.1@35.6,19 36.5,19 37.465,19.965 U4.6@37.465,23.15
NetR5_2: R5.2 R6.2 U4.2 U4.3 | length 5.5
  Top Layer w0.254: U4.2@32.385,23.15 U4.3@33.655,23.15 33.655,20.745 R6.2@33.9,20.5 R5.2@33.9,19
NetR7_2: R7.2 R8.2 U4.22 U4.23 | length 5.5
  Top Layer w0.254: U4.23@32.385,32.85 U4.22@33.655,32.85 33.655,36.755 R8.2@33.9,37
NetR8_1: R8.1 U4.19 | length 5.4
  Top Layer w0.254: R8.1@35.6,37 36.5,37 37.465,36.035 U4.19@37.465,32.85
NetR11_1: R11.1 T2.1 | length 11.8
  Top Layer w0.254: T2.1@50.75,45.5 50.75,46.95 R11.1@50.8,47
  Layer 2 w0.254: 42.75,40 48.25,45.5 T2.1@50.75,45.5
NetR13_1: R13.1 R18A1.2 T3.1 | length 17.4
  Top Layer w0.254: v1(36.75,41) 37.25,41.5 ; T3.1@50.9,40.5 51,40.6 R13.1@51,42
  Layer 2 w0.254: v1(36.75,41) 38.397,39.353 45.942,39.353 47.089,40.5 T3.1@50.75,40.5
NetR15A_2: R15A.2 | length 2